# EAGLE board PCB (EAGLE 9.7.0)
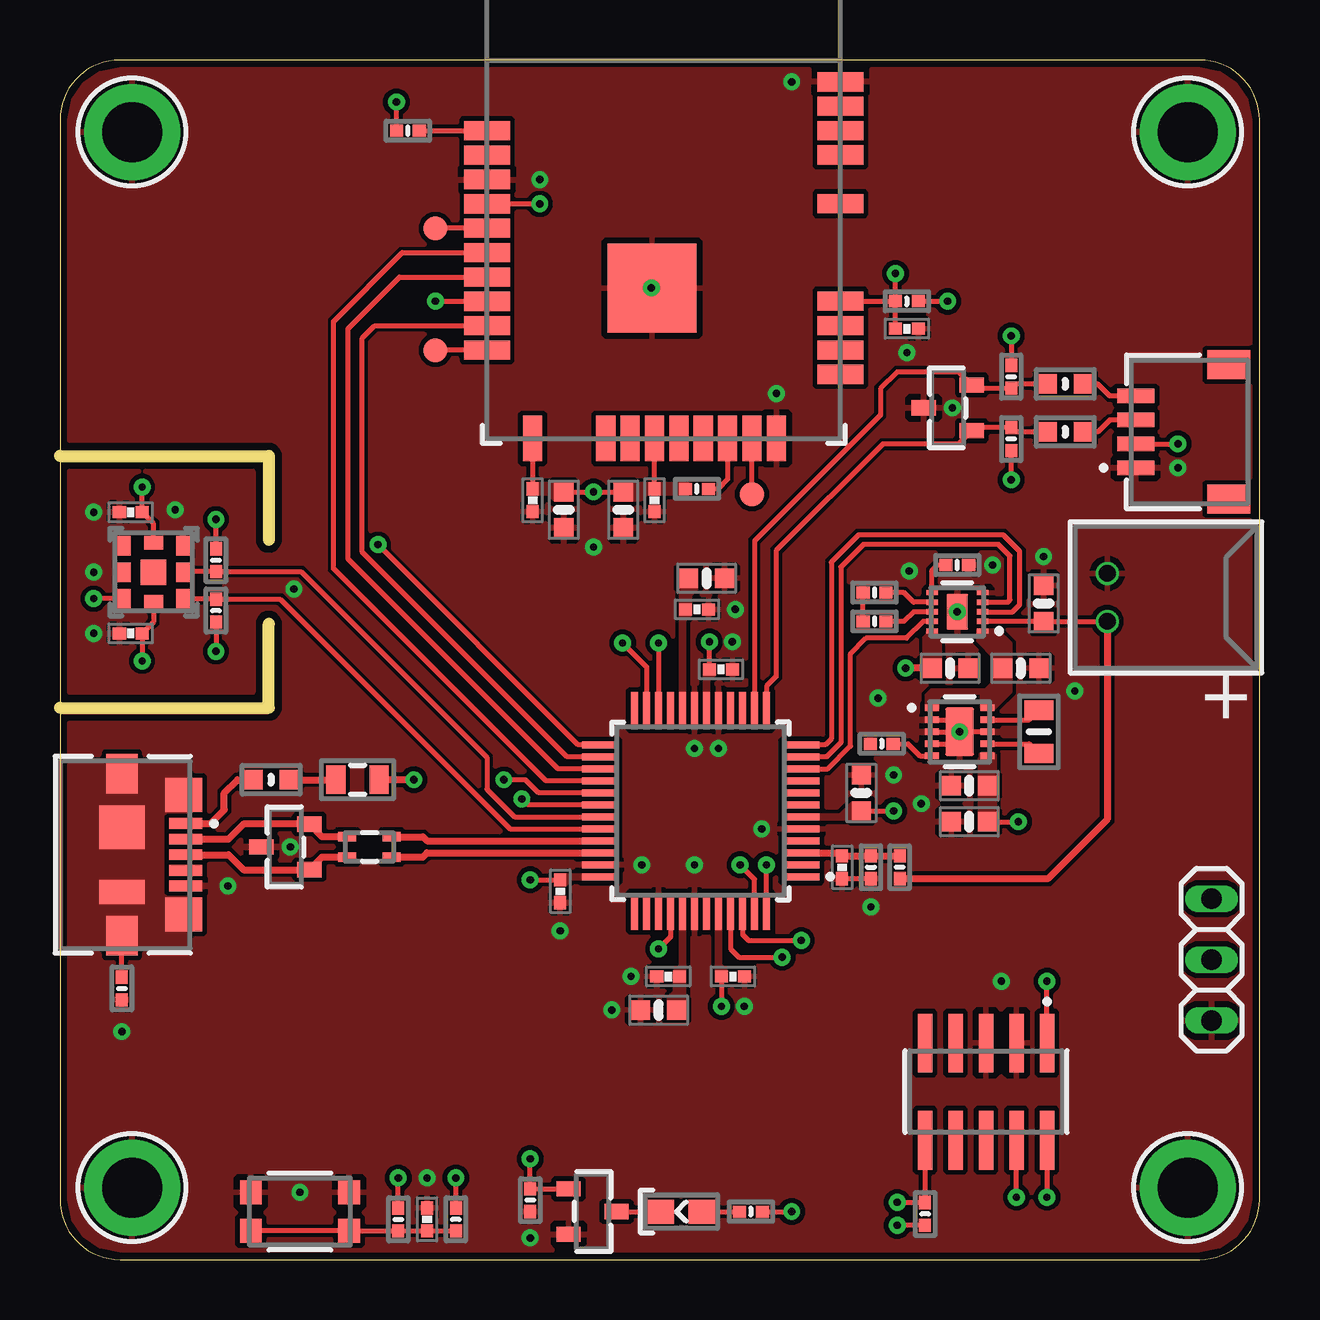
[diagram p0: board, top side]
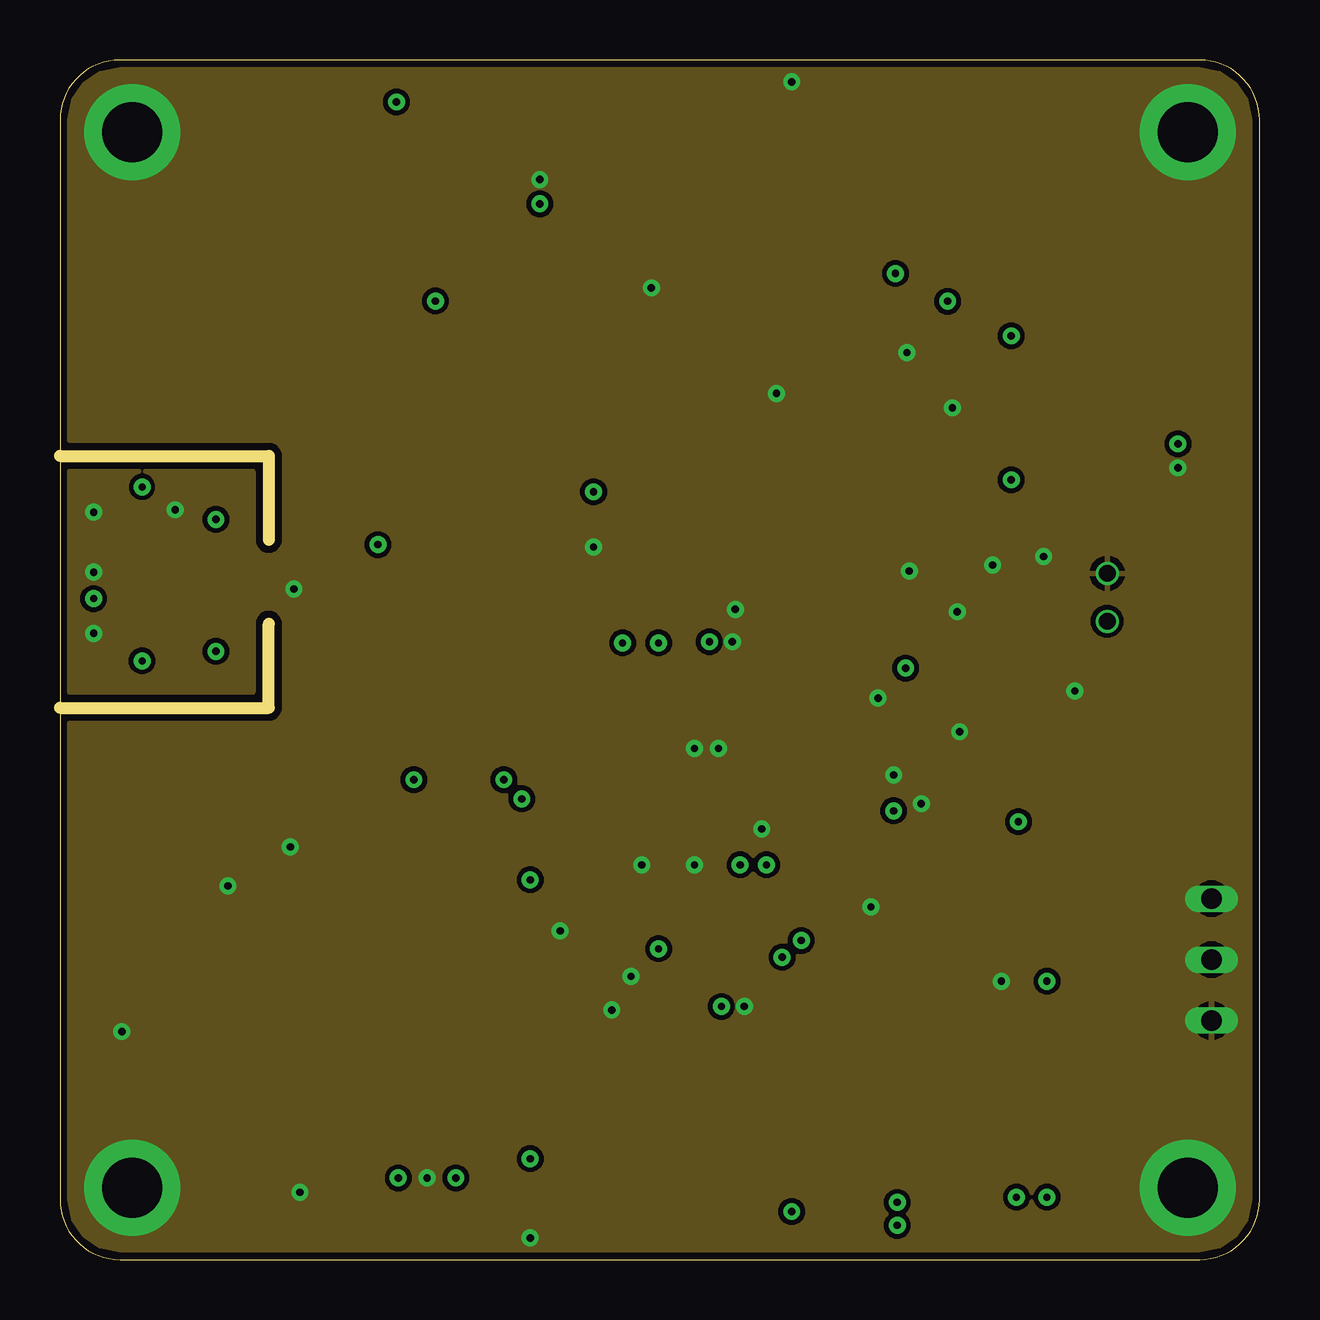
[diagram p1: board, inner layer Route2]
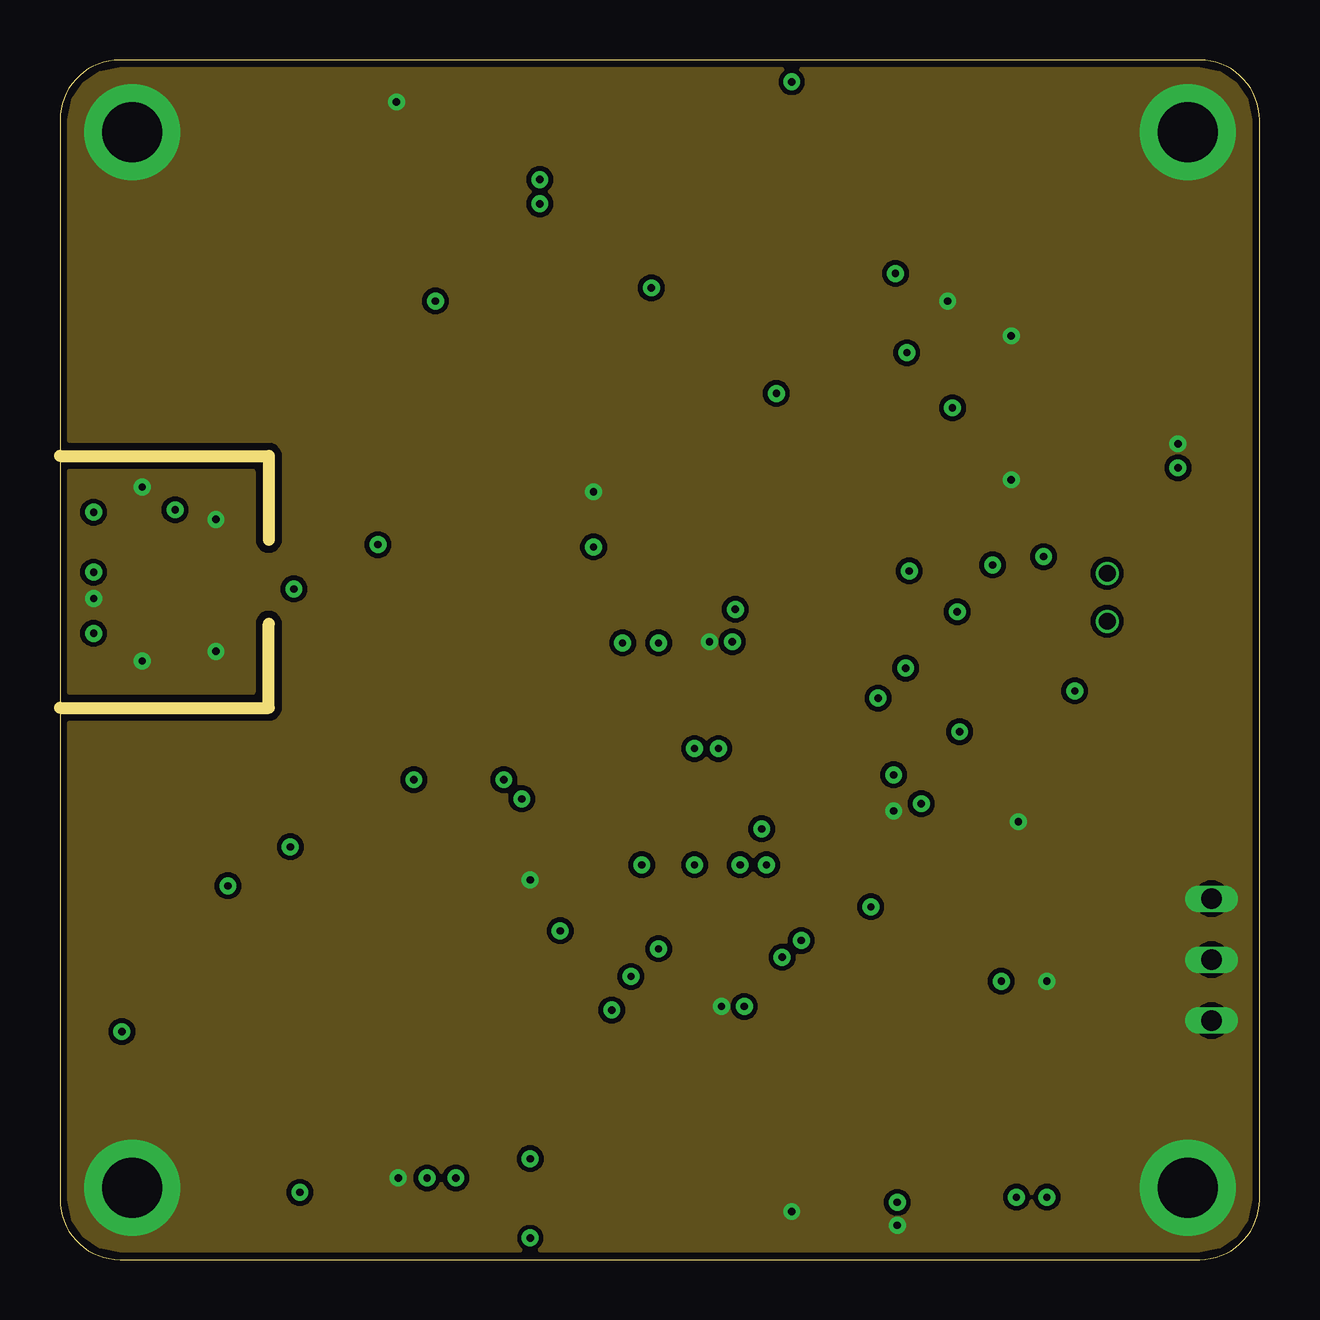
[diagram p2: board, inner layer Route63]
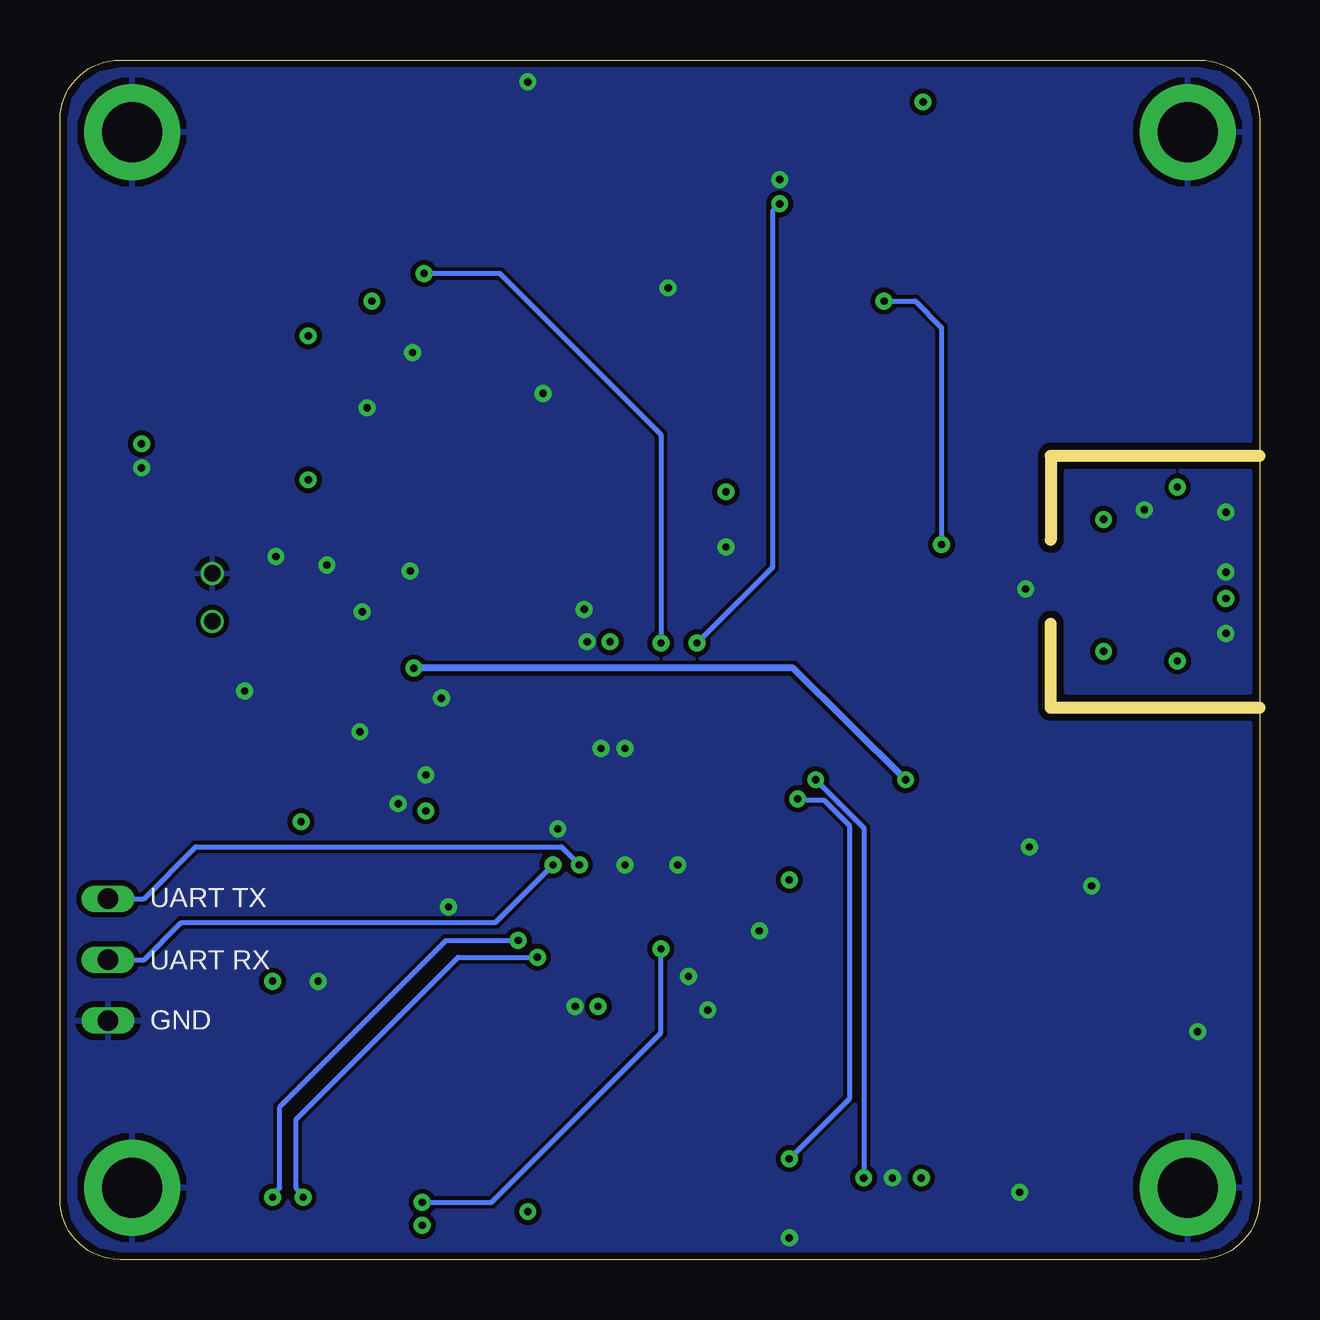
[diagram p3: board, bottom side, seen from below]

Size 50 x 50 mm. Coordinates in mm from the lower left corner, seen from the top.
Outline: 0,33.5 0,47.5 arc-90 2.5,50 47.5,50 arc-90 50,47.5 50,2.5 arc-90 47.5,0 2.5,0 arc-90 0,2.5 0,23
Outline: 0,33.5 0,23
Outline: 0,33.5 8.7,33.5 8.7,30
Outline: 0,23 8.7,23 8.7,26.5
Copper layers (1+2*15+16): Top / Route2 / Route63 / Bottom
Stack-up Default Layer Stack: Top User Defined 0.035mm / Dielectric-2 User Defined 0.2mm / Route2 User Defined 0.0175mm / Dielectric-1 User Defined 1.065mm / Route63 User Defined 0.01755mm / Dielectric-3 User Defined 0.2mm / Bottom User Defined 0.035mm
Design rules: minimum copper width 0.15mm, minimum drill size 0.3mm, copper clearance via to via 0.25mm, copper clearance wire_polygon to pad_smd 0.2mm, copper clearance wire_polygon to via 0.2mm, copper clearance pad_smd to via 0.2mm, copper clearance smd to via (same net) 0.2mm, copper clearance wire_polygon to wire_polygon 0.15mm, copper clearance pad_smd to pad_smd 0.15mm, copper clearance smd to pad (same net) 0.15mm, copper clearance smd to smd (same net) 0.15mm, dimension clearance 0.3mm, via restrict clearance 0mil, restrict clearance 0mil, drill distance 0.54mm, keepout clearance 0mil

## Footprints (pad centres in the part's own frame; a part is rotated, then mirrored left to right if it is on the bottom)
CAP-0603 = smd 0.8 x 0.8: 1 -0.75,0; 2 0.75,0
CAP-0402 = smd 0.55 x 0.5: 1 -0.475,0; 2 0.475,0
SOT23-R = smd 0.635 x 1.016: 1 -0.95,-1; 2 0.95,-1; 3 0,1
WSON-10-2.2X2MM = smd 0.5 x 0.2: 1 -1.05,0.8; 2 -1.05,0.4; 3 -1.05,0; 4 -1.05,-0.4; 5 -1.05,-0.8; 6 1.05,-0.8; 7 1.05,-0.4; 8 1.05,0; 9 1.05,0.4; 10 1.05,0.8 | smd 0.9 x 1.5: 11 0,0
WSON-10-2.5X2.5MM = smd 0.6 x 0.25: 1 -1.15,1; 2 -1.15,0.5; 3 -1.15,0; 4 -1.15,-0.5; 5 -1.15,-1; 6 1.15,-1; 7 1.15,-0.5; 8 1.15,0; 9 1.15,0.5; 10 1.15,1 | smd 1.2 x 2: 11 0,0
TQFP-48 = smd 1.5 x 0.3: 1 -4.2,2.75; 2 -4.2,2.25; 3 -4.2,1.75; 4 -4.2,1.25; 5 -4.2,0.75; 6 -4.2,0.25; 7 -4.2,-0.25; 8 -4.2,-0.75; 9 -4.2,-1.25; 10 -4.2,-1.75; 11 -4.2,-2.25; 12 -4.2,-2.75; 25 4.2,-2.75; 26 4.2,-2.25; 27 4.2,-1.75; 28 4.2,-1.25; 29 4.2,-0.75; 30 4.2,-0.25; 31 4.2,0.25; 32 4.2,0.75; 33 4.2,1.25; 34 4.2,1.75; 35 4.2,2.25; 36 4.2,2.75 | smd 0.3 x 1.5: 13 -2.75,-4.2; 14 -2.25,-4.2; 15 -1.75,-4.2; 16 -1.25,-4.2; 17 -0.75,-4.2; 18 -0.25,-4.2; 19 0.25,-4.2; 20 0.75,-4.2; 21 1.25,-4.2; 22 1.75,-4.2; 23 2.25,-4.2; 24 2.75,-4.2; 37 2.75,4.2; 38 2.25,4.2; 39 1.75,4.2; 40 1.25,4.2; 41 0.75,4.2; 42 0.25,4.2; 43 -0.25,4.2; 44 -0.75,4.2; 45 -1.25,4.2; 46 -1.75,4.2; 47 -2.25,4.2; 48 -2.75,4.2
BMP585 = smd 0.55 x 0.8: 1 -1.225,1.1; 2 -1.225,0; 3 -1.225,-1.1; 5 1.225,-1.1; 6 1.225,0; 7 1.225,1.1 | smd 0.8 x 0.55: 4 0,-1.225; 8 0,1.225 | smd 1.07 x 1.06: 9 0,0
JST-B2B-PH-ANGLED = drill 0.7: P$1 -1,0; P$2 1,0
QWIIC = smd 0.6 x 1.55: 1 -1.5,4.661; 2 -0.5,4.661; 3 0.5,4.661; 4 1.5,4.661 | smd 1.2 x 1.8: 5 -2.8,0.786; 6 2.8,0.786
2X5-1.27 = smd 0.6 x 2.45: 1 -2.54,-2.025; 2 -2.54,2.025; 3 -1.27,-2.025; 4 -1.27,2.025; 5 0,-2.025; 6 0,2.025; 7 1.27,-2.025; 8 1.27,2.025; 9 2.54,-2.025; 10 2.54,2.025
1X3-2.54MM = drill 0.85 long: 1 -2.54,0; 2 0,0; 3 2.54,0
IND-0603 = smd 0.8 x 0.8: 1 -0.75,0; 2 0.75,0
IND-CHOKE-0805 = smd 0.75 x 0.4: 1 -0.925,0.425; 2 0.925,0.425; 3 0.925,-0.425; 4 -0.925,-0.425
IND-0805 = smd 0.8 x 1.2: 1 -0.9,0; 2 0.9,0
DIODE-0603 = smd 1.1 x 1: A -0.85,0; K 0.85,0
MOUNTINGHOLE-2.5-PLATED-THICK = drill 2.5 pad 4: P$1 0,0
WINCS02P = smd 1.9 x 0.8: 1 14.73,2.67; 2 14.73,3.686; 3 14.73,4.702; 4 14.73,5.718; 5 14.73,9.782; 6 14.73,11.814; 7 14.73,12.83; 8 14.73,13.846; 9 14.73,14.862; 10 0,12.824; 11 0,11.808; 12 0,10.792; 13 0,9.776; 14 0,8.76; 15 0,7.744; 16 0,6.728; 17 0,5.712; 18 0,4.696; 19 0,3.68 | smd 0.8 x 1.9: 20 1.9,0; 21 4.948,0; 22 5.964,0; 23 6.98,0; 24 7.996,0; 25 9.012,0; 26 10.028,0; 27 11.044,0; 28 12.06,0 | smd 3.7 x 3.7: 29 6.88,6.27
PTC-0805 = smd 0.8 x 1.2: 1 -0.9,0; 2 0.9,0
RES-0402 = smd 0.55 x 0.5: 1 -0.475,0; 2 0.475,0
KMR221G-LFS = smd 0.9 x 1: 1 -2.05,0.8; 2 -2.05,-0.8; 3 2.05,0.8; 4 2.05,-0.8
B1,00 = smd 1 x 1: TP 0,0
MICRO-USB = smd 0.45 x 1.38: 1 -1.3,2.525; 2 -0.65,2.525; 3 0,2.525; 4 0.65,2.525; 5 1.3,2.525 | smd 1.425 x 1.55: 6 -2.487,2.44; 7 2.487,2.44 | smd 1.65 x 1.3: 8 -3.375,-0.135; 11 3.375,-0.135 | smd 1.8 x 1.9: 9 -1.15,-0.135 | smd 1 x 1.9: 10 1.55,-0.135

## Placement (x,y rotation side)
C1  1uF  [CAP-0603]  37.1,24.65 0 top
C2  1uF  [CAP-0603]  41,27.35 90 top
C3  10uF  [CAP-0603]  40.05,24.65 0 top
C4  10uF  [CAP-0603]  37.9,18.25 180 top
C5  10uF  [CAP-0603]  37.9,19.75 180 top
C6  100nF  [CAP-0402]  27.55,24.6 0 top
C7  100nF  [CAP-0402]  20.85,15.35 270 top
C8  100nF  [CAP-0402]  28.05,11.8 0 top
C9  1uF  [CAP-0603]  33.4,19.45 90 top
C10  1uF  [CAP-0603]  24.95,10.4 180 top
C11  100nF  [CAP-0402]  25.35,11.8 180 top
C12  1uF  [CAP-0603]  26.95,28.4 0 top
C13  100nF  [CAP-0402]  26.55,27.1 0 top
C14  1uF  [CAP-0603]  21,31.25 270 top
C15  100nF  [CAP-0402]  19.7,31.65 270 top
C16  1uF  [CAP-0603]  23.48,31.25 270 top
C17  100nF  [CAP-0402]  24.78,31.65 270 top
C18  100nF  [CAP-0402]  35.3,38.8 0 top
C19  100nF  [CAP-0402]  2.95,26.1 180 top
C20  100nF  [CAP-0402]  2.95,31.15 180 top
C21  100nF  [CAP-0402]  15.3,1.68 90 top
C22  100nF  [CAP-0402]  32.6,16.35 270 top
D1  [SOT23-R]  9.4,17.2 90 top
D2  [SOT23-R]  37,35.5 90 top
IC1  [WSON-10-2.2X2MM]  37.4,27 180 top
IC2  [WSON-10-2.5X2.5MM]  37.5,22 0 top
IC3  [TQFP-48]  26.7,18.7 180 top
IC4  BMP585  [BMP585]  3.9,28.65 180 top
JP1  [JST-B2B-PH-ANGLED]  43.65,27.6 270 top
JP2  [QWIIC]  49.5,34.5 90 top
JP3  [2X5-1.27]  38.6,7 180 top
JP4  [1X3-2.54MM]  48,12.5 90 top
L1  [IND-0603]  8.8,20 0 top
L2  [IND-CHOKE-0805]  12.9,17.2 0 top
L3  2,2u  [IND-0805]  40.8,22 90 top
L4  1k@100MHz  [IND-0603]  41.9,36.5 0 top
L5  1k@100MHz  [IND-0603]  41.9,34.5 0 top
LED1  [DIODE-0603]  25.9,2 180 top
MD1  [MOUNTINGHOLE-2.5-PLATED-THICK]  3,47 0 top
MD2  [MOUNTINGHOLE-2.5-PLATED-THICK]  47,47 0 top
MD3  [MOUNTINGHOLE-2.5-PLATED-THICK]  47,3 0 top
MD4  [MOUNTINGHOLE-2.5-PLATED-THICK]  3,3 0 top
MO1  WINCS02PE  [WINCS02P]  17.8,34.23 0 top
PO1  500m  [PTC-0805]  12.4,20 0 top
Q1  [SOT23-R]  22.2,2 270 top
R1  10k  [RES-0402]  2.58,11.3 90 top
R2  10k  [RES-0402]  37.4,28.95 180 top
R3  18k 1%  [RES-0402]  33.95,27.8 0 top
R4  1k 1%  [RES-0402]  33.95,26.6 0 top
R5  16,2k 1%  [RES-0402]  34.25,21.5 0 top
R6  10k  [RES-0402]  14.5,47.05 180 top
R7  10k  [RES-0402]  26.55,32.12 180 top
R8  10k  [RES-0402]  35.3,39.94 0 top
R9  10k  [RES-0402]  6.5,29.15 90 top
R10  10k  [RES-0402]  6.5,27.05 270 top
R11  10k  [RES-0402]  39.65,36.8 90 top
R12  10k  [RES-0402]  39.65,34.2 270 top
R13  10k  [RES-0402]  14.1,1.68 90 top
R14  330  [RES-0402]  16.5,1.68 270 top
R15  330  [RES-0402]  28.8,2 0 top
R16  10k  [RES-0402]  19.6,2.48 270 top
R17  1M 1%  [RES-0402]  35,16.35 270 top
R18  1M 1%  [RES-0402]  33.8,16.35 90 top
R19  10k  [RES-0402]  36.06,1.9 270 top
SP1  [KMR221G-LFS]  10,2 180 top
TP1  TPB1,00  [B1,00]  15.65,37.91 0 top
TP2  TPB1,00  [B1,00]  15.65,42.98 0 top
TP3  TPB1,00  [B1,00]  28.84,31.9 180 top
USB1  [MICRO-USB]  2.71,16.88 270 top

## Library data of the parts
C1-C22 D1 D2 IC2 IC4 JP1-JP4 L1-L5 LED1 MO1 PO1 Q1 R1-R19 SP1 TP1-TP3 USB1 = ZPR Library
IC1 = ZPR Library; COPYRIGHT: Copyright (C) 2025 Ultra Librarian. All rights reserved.; DATASHEET: https://www.ti.com/lit/gpn/bq25185; DESCRIPTION: 1-cell, 1-A stand-alone linear battery charger with power path and solar input support 10-WSON -40 to 125; MANUFACTURER_NAME: Texas Instruments; MANUFACTURER_PART_NUMBER: BQ25185DLHR; TYPE: Power Management
IC3 = ZPR Library; COPYRIGHT: Copyright (C) 2025 Ultra Librarian. All rights reserved.; MANUFACTURER_NAME: Microchip; MANUFACTURER_PART_NUMBER: PIC32CM2532LE00048T-E/Y8X
MD1-MD4 = ZPR Library; BOM: EXCLUDE

## Nets
!CE: IC1.4 IC3.11
A: LED1.A R15.1
BAT: C2.1 IC1.2 JP1.P$2 R17.2
BTN: C21.1 R13.1 R14.2 SP1.1 SP1.3
CON-USB_N: D1.2 L2.1 USB1.2
CON-USB_P: D1.1 L2.4 USB1.3
GND: C1.2 C2.2 C3.2 C4.2 C5.2 C6.2 C7.2 C8.2 C9.2 C10.2 C11.2 C12.2 C13.2 C14.2 C15.2 C16.2 C17.2 C18.2 C19.2 C20.2 C21.2 C22.2 D1.3 D2.3 IC1.5 IC1.11 IC2.2 IC2.3 IC2.4 IC2.8 IC2.11 IC3.5 IC3.17 IC3.19 IC3.35 IC3.39 IC3.42 IC4.3 IC4.6 JP1.P$1 JP2.1 JP3.3 JP3.5 JP4.1 MD1.P$1 MD2.P$1 MD3.P$1 MD4.P$1 MO1.9 MO1.12 MO1.28 MO1.29 Q1.2 R1.1 R2.1 R3.1 R4.1 R5.1 R16.2 R18.1 SP1.2 SP1.4 USB1.5
ILIM: IC1.7 R3.2
IN: C1.1 IC1.10 PO1.2
ISET: IC1.8 R4.2
K: LED1.K Q1.3
LX1: IC2.7 L3.1
LX2: IC2.9 L3.2
MCU-BTN: IC3.29 R14.1
MCU-GAUGE: C22.1 IC3.3 R17.1 R18.2
MCU-I2C-SCK: IC3.32 IC4.1 R10.1
MCU-I2C-SDA: IC3.31 IC4.2 R9.1
MCU-LED: IC3.30 Q1.1 R16.1
MCU-RESET: IC3.40 JP3.10 R19.1
MCU-SWCLK: IC3.45 JP3.4
MCU-SWDIO: IC3.46 JP3.2
MCU-UART-RX: IC3.48 JP4.2
MCU-UART-TX: IC3.47 JP4.3
N$3: JP2.4 L4.2
N$4: JP2.3 L5.2
N$11: IC2.5 R5.2
P3V3: C4.1 C5.1 C6.1 C7.1 C8.1 C9.1 C14.1 C15.1 C16.1 C17.1 C19.1 C20.1 IC2.6 IC3.6 IC3.18 IC3.36 IC3.44 IC4.4 IC4.7 IC4.8 JP2.2 JP3.1 MO1.20 MO1.23 R6.2 R7.2 R8.2 R9.2 R10.2 R11.2 R12.2 R13.2 R15.2 R19.2
QWIIC-I2C-SCK: D2.2 IC3.14 L4.1 R11.1
QWIIC-I2C-SDA: D2.1 IC3.13 L5.1 R12.1
SHIELD: R1.2 USB1.6 USB1.7 USB1.8 USB1.9 USB1.10 USB1.11
STAT1: IC1.9 IC3.10
STAT2: IC1.3 IC3.12
STRAP1: MO1.10 R6.1
STRAP2: MO1.26 R7.1
SYS: C3.1 IC1.1 IC2.1 IC2.10
TS: IC1.6 R2.2
UART1_RX: MO1.19 TP1.TP
UART1_TX: MO1.14 TP2.TP
UART2_TX: MO1.27 TP3.TP
USB-VBUS: L1.1 USB1.1
USB_N: IC3.33 L2.2
USB_P: IC3.34 L2.3
VBUS-FUSE: L1.2 PO1.1
VDDCORE: C10.1 C11.1 IC3.41
VDDPLL: C12.1 C13.1 IC3.20
WINCS02-INT: IC3.23 MO1.13
WINCS02-RESET: C18.1 IC3.22 MO1.4 R8.1
WINCS02-SPI-CS: IC3.27 MO1.16
WINCS02-SPI-MISO: IC3.25 MO1.17
WINCS02-SPI-MOSI: IC3.28 MO1.15
WINCS02-SPI-SCK: IC3.26 MO1.18

## Tracks (layer width: path | path; a pad name or v marks a point on that pad's centre or on a via)
!CE
  Top 0.2: IC1.4 39.5,27.4 39.6,27.5 39.6,29.32 39.12,29.8 33.48,29.8 32.55,28.87 32.55,21.55 31.95,20.95 IC3.11
A
  Top 0.2: LED1.A R15.1
BAT
  Top 0.2: JP1.P$2 C2.1 IC1.2
  Top 0.3: JP1.P$2 43.65,18.35 41.17,15.88 R17.2
BTN
  Top 0.2: SP1.3 SP1.1 R13.1 C21.1 R14.2
CON-USB_N
  Top 0.3: USB1.2 7.03,17.52 7.65,18.15 D1.2 10.93,17.62 L2.1
CON-USB_P
  Top 0.3: USB1.3 7.03,16.88 7.65,16.25 D1.1 10.93,16.77 L2.4
GND  (via drill 0.3)
  Top 0.2: IC2.2 37,22.5 IC2.11 | IC2.3 IC2.11 | IC2.4 37,21.5 IC2.11 | IC2.8 IC2.11 | R4.1 R3.1 | 24.68,40.47 MO1.29 24.68,40.52 | R18.1 C22.2
  other vias: 7,15.57 9.6,17.2 37.4,27 37.2,35.5 37.5,22 22.24,29.7 39.23,11.6 35.4,28.7 20.85,13.7 28.52,10.55 23.8,11.8 23,10.4 34.75,20.2 34.1,23.4 38.88,28.95 46.6,33 1.4,28.65 1.4,26.1 1.4,31.15 4.8,31.25 20,45.02 29.86,36.1 30.5,49.09 41,29.3 24.25,16.45 26.45,16.45 29.25,17.95 26.45,21.3 27.45,21.3 28.15,27.1 42.3,23.7 24.65,40.5 9.75,27.95 2.58,9.5 35.3,37.8 33.8,14.7 35.9,19 19.6,0.9 10,2.8 15.3,3.4 28.02,25.75
  pour Top (rank 6): 2.5,0 arc-90 0,2.5 0,47.5 arc-90 2.5,50 47.5,50 arc-90 50,47.5 50,2.5 arc-90 47.5,0
  pour Route2: 2.5,0 arc-90 0,2.5 0,47.5 arc-90 2.5,50 47.5,50 arc-90 50,47.5 50,2.5 arc-90 47.5,0
  pour Bottom: 2.5,0 arc-90 0,2.5 0,47.5 arc-90 2.5,50 47.5,50 arc-90 50,47.5 50,2.5 arc-90 47.5,0
ILIM
  Top 0.2: IC1.7 | IC1.7 35.58,27.4 35.18,27.8 R3.2
IN  (via drill 0.3)
  Top 0.3: C1.1 v35.25,24.65 | v14.75,20 PO1.2
  Bottom 0.3: v14.75,20 19.45,24.65 v35.25,24.65
  pour Top (no thermals): 36.6,26.3 36.1,26.3 36.1,26.1 35.95,25.95 35.95,24.25 36.75,24.25 36.75,25.95 36.6,26.1
ISET
  Top 0.2: R4.2 35.19,26.6 35.59,27 IC1.8
K
  Top 0.2: Q1.3 LED1.K
LX1
  Top 0.2: IC2.7 | IC2.7 40.4,21.5 L3.1
LX2
  Top 0.2: IC2.9 40.4,22.5 L3.2
MCU-BTN  (via drill 0.3)
  Top 0.2: R14.1 v16.5,3.4 | IC3.29 19.95,19.45 19.4,20 v18.5,20
  Bottom 0.2: v18.5,20 16.5,18 v16.5,3.4
MCU-GAUGE
  Top 0.3: R17.1 R18.2 C22.1 32.48,16.95 IC3.3
MCU-I2C-SCK
  Top 0.2: IC4.1 5.15,27.52 R10.1 9.18,27.52 18.75,17.95 IC3.32
MCU-I2C-SDA
  Top 0.2: IC4.2 5.15,28.68 R9.1 10.05,28.68 17.8,20.92 17.8,19.6 18.95,18.45 IC3.31
MCU-LED  (via drill 0.3)
  Top 0.2: IC3.30 19.5,18.95 v19.25,19.2 | Q1.1 R16.1 v19.6,4.2
  Bottom 0.2: v19.25,19.2 19.2,19.15 18.15,19.15 17.1,18.1 17.1,6.7 v19.6,4.2
MCU-RESET  (via drill 0.3)
  Top 0.2: IC3.40 25.45,13.45 v24.95,12.95 | JP3.10 R19.1 v34.91,2.38 v34.9,2.38
  Bottom 0.2: v24.95,12.95 24.95,9.45 32.02,2.38 v34.9,2.38
MCU-SWCLK  (via drill 0.3)
  Top 0.2: v39.87,2.6 JP3.4 | IC3.45 27.95,12.95 28.3,12.6 v30.1,12.6
  Bottom 0.2: v30.1,12.6 33.4,12.6 40.17,5.83 40.17,3 39.87,2.7 v39.87,2.6
MCU-SWDIO  (via drill 0.3)
  Top 0.2: JP3.2 v41.14,2.6 | IC3.46 28.45,13.55 28.7,13.3 v30.9,13.3
  Bottom 0.2: v30.9,13.3 33.9,13.3 40.84,6.36 40.84,3 41.14,2.7 v41.14,2.6
MCU-UART-RX  (via drill 0.3)
  Top 0.2: IC3.48 v29.45,16.45
  Bottom 0.2: JP4.2 46.5,12.5 44.95,14.05 31.85,14.05 v29.45,16.45
MCU-UART-TX  (via drill 0.3)
  Top 0.2: IC3.47 28.95,15.85 v28.35,16.45
  Bottom 0.2: JP4.3 46.5,15.04 44.33,17.2 29.1,17.2 v28.35,16.45
N$3
  Top 0.2: JP2.4 43.75,36 43.25,36.5 L4.2
N$4
  Top 0.2: JP2.3 43.75,35 43.25,34.5 L5.2
N$11
  Top 0.2: R5.2 35.35,21.5 35.85,21 IC2.5
P3V3  (via drill 0.3)
  Top 0.2: C17.1 MO1.23 | MO1.20 C15.1 | C14.1 v22.24,32 C16.1 | R6.2 v14.03,48.25 | JP2.2 v46.6,34 | v39.65,38.5 R11.2 | v39.65,32.5 R12.2 | R15.2 v30.5,2 | IC4.4 3.9,30.68 C20.1 v3.42,32.2 | IC4.8 3.9,26.57 C19.1 v3.42,24.95 | IC4.7 v1.4,27.55 | R9.2 v6.5,30.85 | R10.2 v6.5,25.35 | R13.2 v14.1,3.4 | C4.1 v39.95,18.25 | v19.6,15.82 C7.1 | C9.1 v34.75,18.7 | JP3.1 v41.14,11.6 | R19.2 v34.9,1.43 | R8.2 v37,39.94 | C8.1 v27.57,10.56 v27.57,10.55 | C6.1 v27.07,25.74 v27.07,25.75
  pour Route63: 2.5,0 arc-90 0,2.5 0,47.5 arc-90 2.5,50 47.5,50 arc-90 50,47.5 50,2.5 arc-90 47.5,0
  pour Top (no thermals): 21.4,32.4 19.45,32.4 19.45,31.85 20.35,31.85 20.6,31.6 21.4,31.6
  pour Top (no thermals): 23.1,32.4 23.1,31.6 24.25,31.6 24.5,31.85 26.35,31.85 26.35,32.4
  pour Top (no thermals): 38.35,21.15 38.25,21.05 38.25,17.85 39.05,17.85 39.05,21.05 38.95,21.15
  pour Top (no thermals): 27.3,15.25 27.3,11.55 27.85,11.55 27.85,12.05 27.6,12.3 27.6,15.25
  pour Top (no thermals): 20.6,16.1 23.25,16.1 23.25,15.8 21.35,15.8 21.1,15.55 20.6,15.55
  pour Top (no thermals): 30.15,18.3 33.8,18.3 33.8,19.1 33,19.1 32.5,18.6 30.15,18.6
  pour Top (no thermals): 27.35,24.85 26.8,24.85 26.8,22.15 27.1,22.15 27.1,24.1 27.35,24.35
QWIIC-I2C-SCK
  Top 0.2: L4.1 39.83,36.5 R11.1 38.12,36.33 D2.2 37.45,37 34.9,37 34.2,36.3 34.2,35.2 28.95,29.95 IC3.14
QWIIC-I2C-SDA
  Top 0.2: L5.1 39.83,34.5 R12.1 38.12,34.67 D2.1 37.45,34 36,34 34.3,34 29.85,29.55 29.85,24.3 29.45,23.9 IC3.13
SHIELD
  Top 0.2: R1.2 USB1.11
  pour Top (no thermals): 0,20.8 5.4,20.8 5.4,18.5 4.5,18.5 4.5,15.3 5.4,15.3 5.4,13 0,13
STAT1
  Top 0.2: IC1.9 | IC1.9 35.98,26.6 35.28,25.9 33.6,25.9 32.95,25.25 32.95,21.4 32,20.45 IC3.10
STAT2
  Top 0.2: IC1.3 39.7,27 40,27.3 40,29.52 39.32,30.2 33.28,30.2 32.15,29.07 32.15,21.7 31.9,21.45 IC3.12
STRAP1
  Top 0.2: R6.1 MO1.10
STRAP2
  Top 0.2: R7.1 27.43,32.12 27.83,32.52 MO1.26
SYS
  Top 0.2: IC1.1
  pour Top (no thermals): 38.2,26.3 38.2,25.75 38.9,25.05 38.9,24.15 38.55,23.8 36.3,23.8 36.05,23.55 36.05,22.85 36.65,22.85 36.65,23.35 36.85,23.55 38.35,23.55 38.35,22.9 38.95,22.9 39.7,23.65 39.7,25.7 39.1,26.3
TS
  Top 0.2: IC1.6 36.35,28.73 36.58,28.95 R2.2
UART1_RX
  Top 0.2: MO1.19 TP1.TP
UART1_TX
  Top 0.2: MO1.14 TP2.TP
UART2_TX
  Top 0.2: TP3.TP MO1.27
USB-VBUS
  Top 0.3: USB1.1 6.28,18.18 6.85,18.75 6.85,19.45 7.4,20 L1.1
USB_N
  Top 0.3: IC3.33 15.3,17.45 15.12,17.62 L2.2
USB_P
  Top 0.3: IC3.34 15.3,16.95 15.12,16.77 L2.3
VBUS-FUSE
  Top 0.3: L1.2 PO1.1
VDDCORE
  pour Top (no thermals): 26.1,15.25 26.1,10 25.3,10 25.3,10.95 25.55,11.2 25.55,12.05 25.8,12.3 25.8,15.25
VDDPLL
  pour Top (no thermals): 25.8,28.8 25.8,22.15 26.1,22.15 26.1,26.6 26.35,26.85 26.35,27.65 26.6,27.9 26.6,28.8
WINCS02-INT  (via drill 0.3)
  Top 0.2: MO1.13 v20,44 | v23.45,25.7 24.45,24.7 IC3.23
  Bottom 0.2: v23.45,25.7 20.3,28.85 20.3,43.7 v20,44
WINCS02-RESET  (via drill 0.3)
  Top 0.2: v24.95,25.7 IC3.22 | MO1.4 R8.1 | C18.1 R8.1 | R8.1 v34.83,41.1
  Bottom 0.2: v24.95,25.7 24.95,34.39 31.66,41.1 v34.83,41.1
WINCS02-SPI-CS
  Top 0.2: IC3.27 20.75,20.45 12,29.2 12,38.8 14.15,40.95 MO1.16
WINCS02-SPI-MISO  (via drill 0.3)
  Top 0.2: 17.86,40 MO1.17 15.66,39.94 v15.65,39.95 | IC3.25 21.6,21.45 v13.25,29.8
  Bottom 0.2: v15.65,39.95 14.35,39.95 13.25,38.85 v13.25,29.8
WINCS02-SPI-MOSI
  Top 0.2: IC3.28 20.25,19.95 11.4,28.8 11.4,39.1 14.27,41.97 MO1.15
WINCS02-SPI-SCK
  Top 0.2: MO1.18 13.12,38.92 12.6,38.4 12.6,29.5 21.14,20.95 IC3.26
(copper drawn outside any net)
  shapes: Top area x5

## Text on the board
SilkscreenTop: +
SilkscreenBottom: UART TX | UART RX | GND